# Altium PCB Main.PcbDoc (part 2 of 2)
Units mil, origin at the board's own origin, x right, y up, seen from the top; angles counter-clockwise.
Board outline 3937.01 x 3937.01 mil, 2 copper layers (Top Layer, Bottom Layer); 174 components, 113 nets, 601 pads, 322 vias.
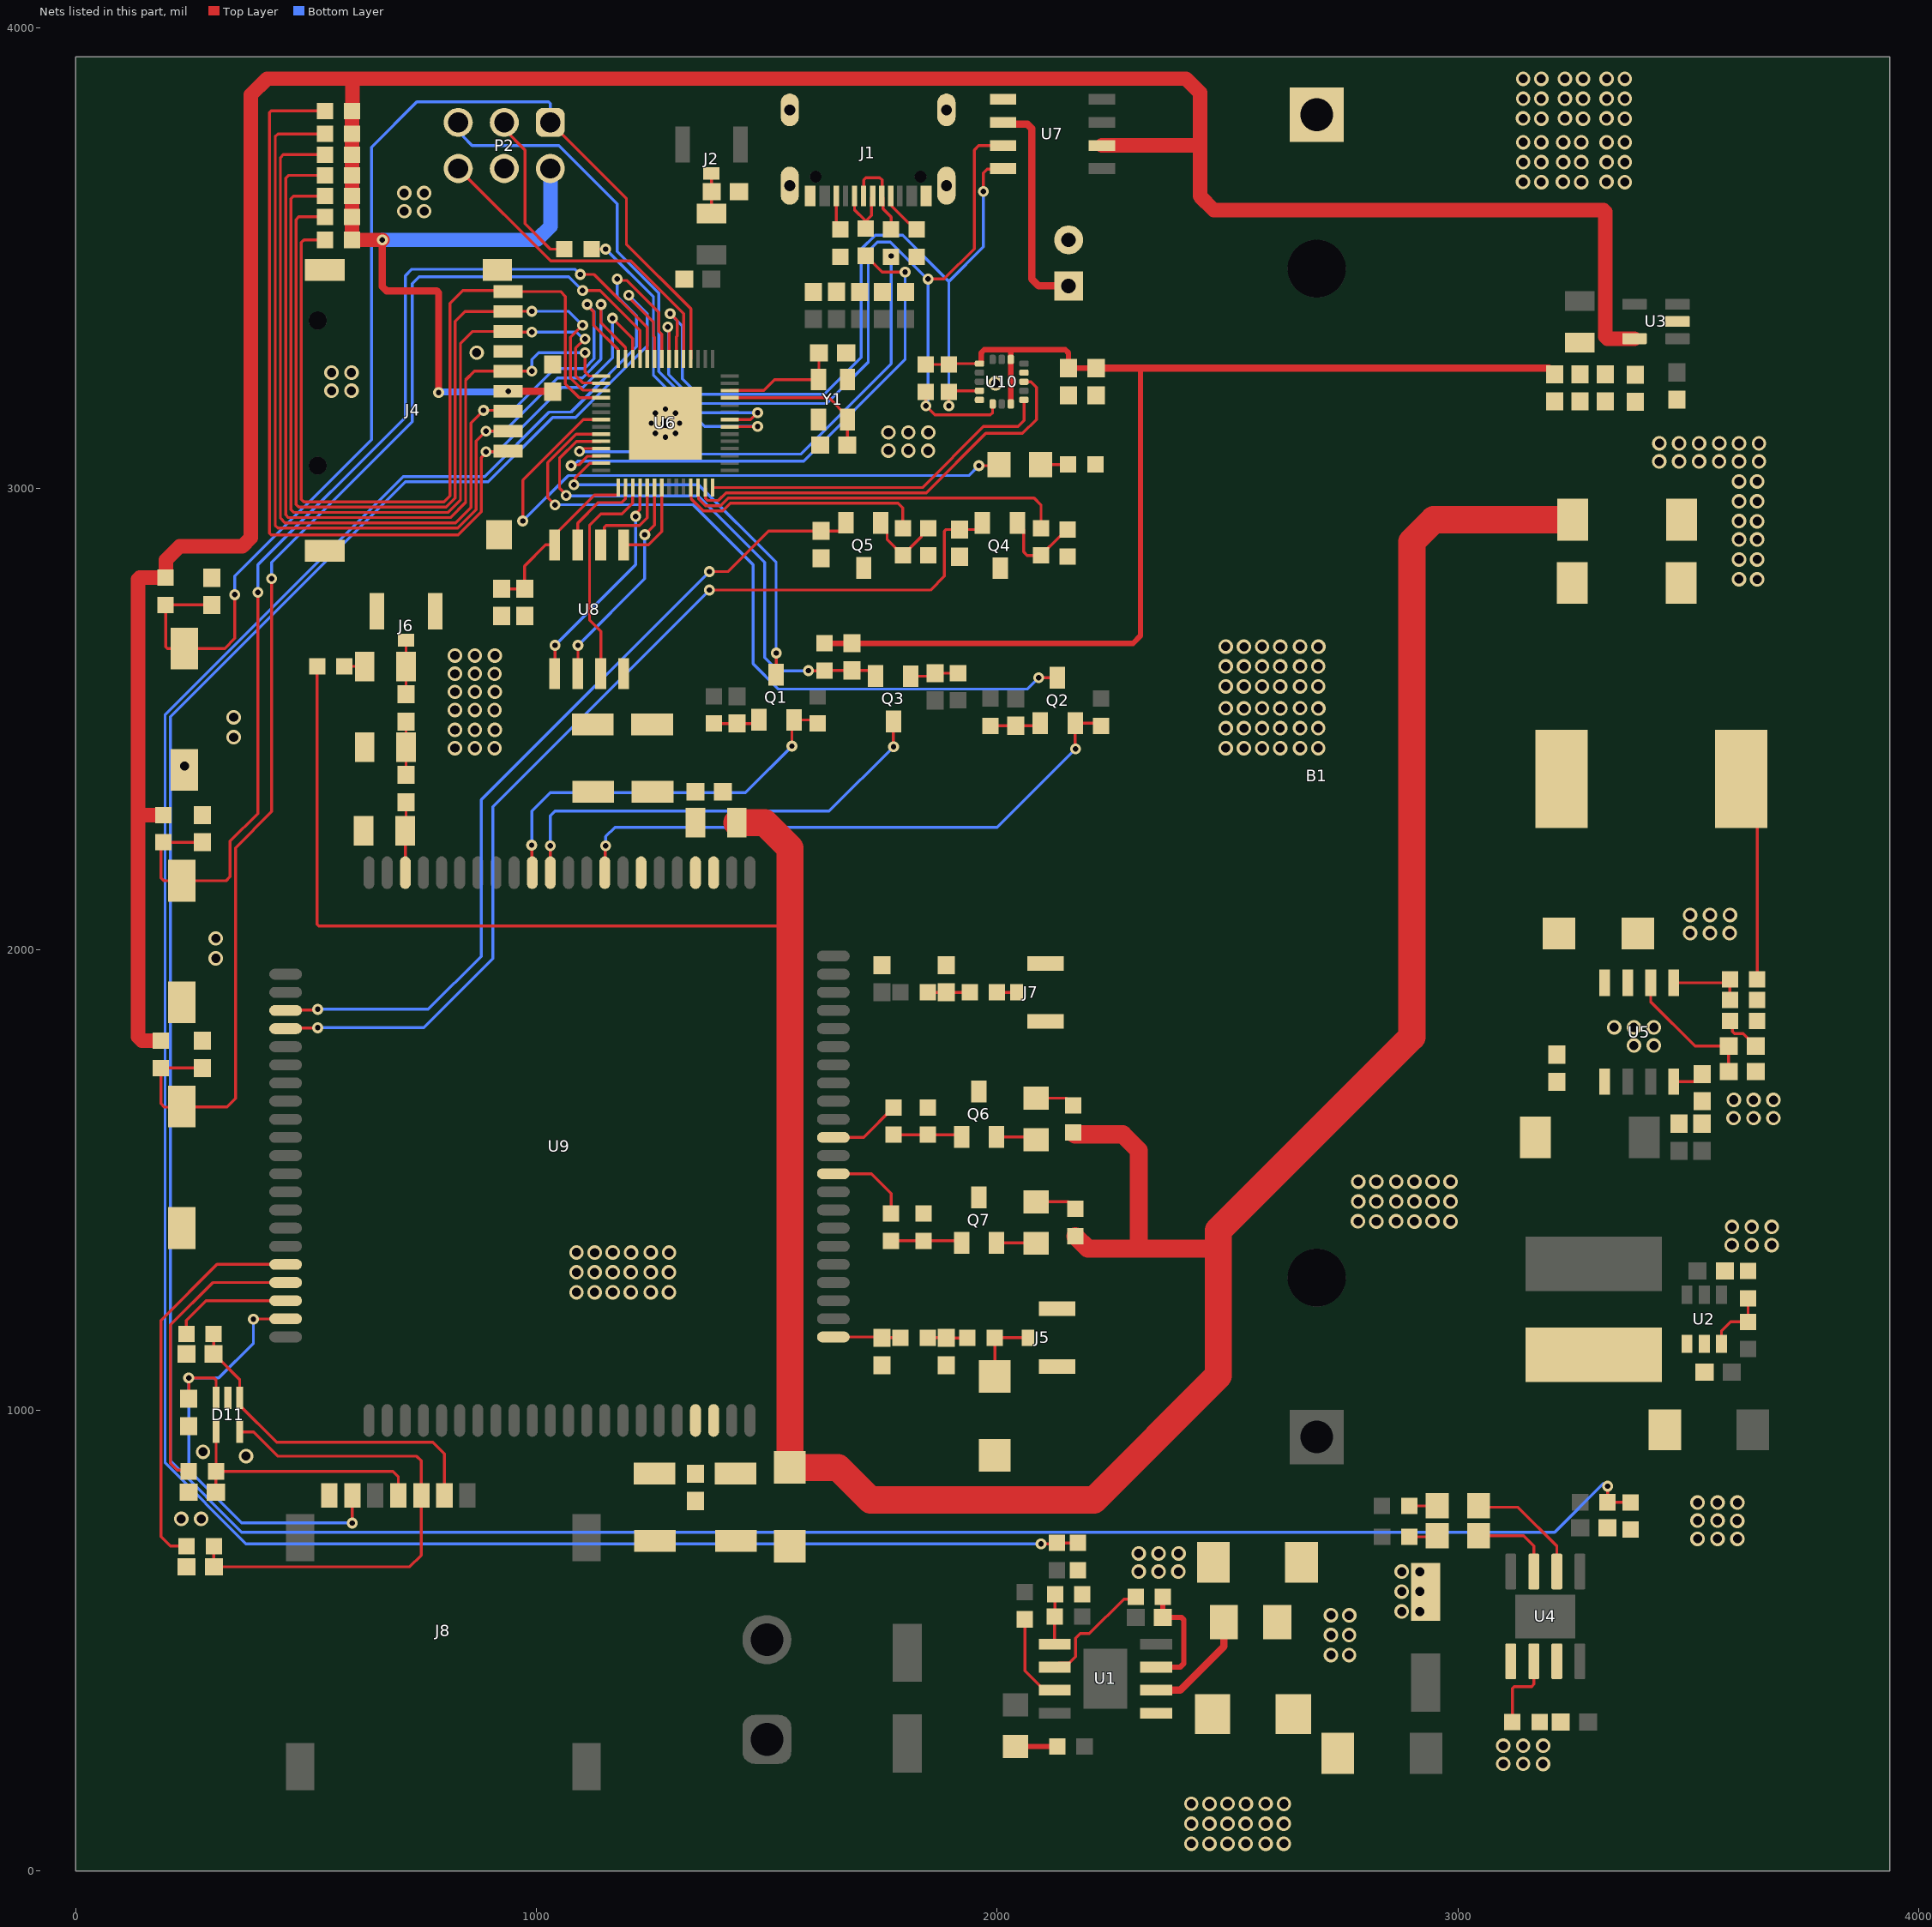
[diagram p2: the nets of this part, all layers, seen from the top]

## Via types
v1: diameter 31.5, hole 19.68, Top Layer to Bottom Layer, tented both sides, 252 vias
v2: diameter 23.62, hole 11.81, Top Layer to Bottom Layer, tented both sides, 70 vias

## Nets (pads, with @x,y where several pads share a name; then routed paths per layer and width w, separated by ;. In a path a pad name is that pad's centre, name@x,y a point inside that pad or via, vN(x,y) a via of type N, cw(c..) or ccw(c..) an arc to the next point about the centre after c; other vN are vias at no path point) (continued)
BATTERY-: B1.2 C4.1 C5.1 C6.2 C7.1 C8.1 C9.1 C10.1 C12.2 C13.2 C14.1 C16.1 C17.1 C18.2 C19.1 C20.1 C21.1 C22.1 C23.2 C24.1 C25.1 C26.1 C27.1 C28.1 C29.2 C30.1 C31.1 C32.2 C33.2 C34.1 C35.1 C36.1 C37.2 C38.1 C39.1 C42.1 C43.1 C44.2 C45.2 C46.2 C47.2 C48.1 C49.2 C50.2 C51.1 C52.2 C53.2 C58.2 C59.2 C60.1 C61.1 D3.1 D7.1 D9.1 D10.1 D11.2 J1.A1/B12 J1.A12/B1 J1.Shell J3.2 J4.6 J4.Shell J5.2 J6.2 J7.2 J8.5 L7.1 L8.1 P2.4 Q4.3 Q5.3 Q6.3 Q7.3 R5.1 R6.1 R9.2 R11.2 R14.2 R16.1 R17.1 R20.2 R21.2 R25.2 R52.2 R53.2 R58.1 R59.1 SW1.1 SW2.1 SW3.1 U2.2 U3.2 U4.3 U5.7 U6.57 U7.5 U8.4 U10.5 U10.12 Y1.2 Y1.4
  other v1: 2421.26,59.06 2460.63,59.06 2500,59.06 2539.37,59.06 2582.68,59.06 2622.05,59.06 2421.26,102.36 2460.63,102.36 2500,102.36 2539.37,102.36 2582.68,102.36 2622.05,102.36 2421.26,145.67 2460.86,145.18 2500,145.67 2539.6,145.18 2582.68,145.67 2622.27,145.18 3098.43,232.28 3141.73,232.28 3184.55,232.06 3098.43,271.65 3141.73,271.65 3185.04,271.65 2724.41,468.5 2763.78,468.5 2724.41,511.81 2763.78,511.81 2764.01,554.63 2724.41,555.12 2877.95,562.99 2917.32,562.99 2877.95,606.3 2917.32,606.3 2307.09,649.61 2350.39,649.61 2393.21,649.38 2877.95,649.61 2917.55,649.12 2307.09,688.98 2350.39,688.98 2393.7,688.98 3520.17,720.7 3563.48,720.7 3606.79,720.7 3520.17,760.07 3563.48,760.07 3606.3,759.84 228.83,764.01 272.14,764.01 3520.17,799.44 3563.48,799.44 3606.79,799.44 369.26,900.25 276.08,909.67 1086.61,1255.91 1125.98,1255.91 1165.35,1255.91 1204.72,1255.91 1248.03,1255.91 1287.4,1255.91 1086.61,1299.21 1125.98,1299.21 1165.35,1299.21 1204.72,1299.21 1248.03,1299.21 1287.4,1299.21 1086.61,1342.52 1126.21,1342.03 1165.35,1342.52 1204.95,1342.03 1248.03,1342.52 1287.63,1342.03 3594.49,1358.27 3637.8,1358.27 3681.1,1358.27 3637.8,1397.64 3681.1,1397.64 3594.97,1397.86 2822.83,1409.45 2905.51,1409.45 2984.25,1409.45 2783.24,1409.94 2865.92,1409.94 2944.66,1409.94 2783.46,1452.76 2822.83,1452.76 2866.14,1452.76 2905.51,1452.76 2944.88,1452.76 2984.25,1452.76 2783.46,1496.06 2822.83,1496.06 2866.14,1496.06 2905.51,1496.06 2944.88,1496.06 2984.25,1496.06 3598.43,1633.86 3641.73,1633.86 3685.04,1633.86 3598.91,1673.45 3641.73,1673.23 3685.04,1673.23 3381.89,1791.34 3425.2,1791.34 3339.07,1830.93 3381.89,1830.71 3425.2,1830.71 303.64,1980.54 303.64,2023.85 3503.94,2035.43 3547.24,2035.43 3590.06,2035.21 3503.94,2074.8 3547.24,2074.8 3590.55,2074.8 236.22,2397.64 822.83,2437.01 866.14,2437.01 908.96,2436.78 2496.06,2437.01 2535.43,2437.01 2574.8,2437.01 2614.17,2437.01 2657.48,2437.01 2696.85,2437.01 342.52,2460.63 822.83,2476.38 866.14,2476.38 909.45,2476.38 2496.06,2480.31 2535.43,2480.31 2574.8,2480.31 2614.17,2480.31 2657.48,2480.31 2696.85,2480.31 342.52,2503.94 822.83,2519.69 866.14,2519.69 908.96,2519.46 2496.06,2523.62 2535.66,2523.14 2574.8,2523.62 2614.4,2523.14 2657.48,2523.62 2697.08,2523.14 822.83,2559.06 866.14,2559.06 909.45,2559.06 2496.06,2570.87 2535.43,2570.87 2574.8,2570.87 2614.17,2570.87 2657.48,2570.87 2696.85,2570.87 822.83,2598.43 866.14,2598.43 908.96,2598.2 2496.06,2614.17 2535.43,2614.17 2574.8,2614.17 2614.17,2614.17 2657.48,2614.17 2696.85,2614.17 822.83,2637.8 866.14,2637.8 909.45,2637.8 2496.06,2657.48 2535.66,2656.99 2574.8,2657.48 2614.4,2656.99 2657.48,2657.48 2697.08,2656.99 3610.01,2803.64 3649.61,2803.15 3610.24,2846.46 3649.61,2846.46 3610.24,2889.76 3649.61,2889.76 3610.01,2929.62 3649.61,2929.13 3610.24,2972.44 3649.61,2972.44 3610.24,3015.75 3649.61,3015.75 3437.01,3059.06 3480.31,3059.06 3523.62,3059.06 3566.93,3059.06 3610.24,3059.06 3653.54,3059.06 1763.78,3082.68 1807.09,3082.68 1849.91,3082.45 3437.49,3098.65 3480.31,3098.43 3523.62,3098.43 3567.42,3098.65 3610.24,3098.43 3653.54,3098.43 1763.78,3122.05 1807.09,3122.05 1850.39,3122.05 1279.75,3142.19 555.12,3212.6 598.43,3212.6 1996.06,3228.35 555.12,3251.97 598.43,3251.97 870.08,3295.28 712.6,3602.36 755.91,3602.36 712.6,3641.73 755.91,3641.73 3181.1,3665.35 3267.72,3665.35 3362.2,3665.35 3141.51,3665.84 3228.12,3665.84 3322.61,3665.84 3141.73,3708.66 3181.1,3708.66 3228.35,3708.66 3267.72,3708.66 3322.83,3708.66 3362.2,3708.66 3141.73,3751.97 3181.1,3751.97 3228.35,3751.97 3267.72,3751.97 3322.83,3751.97 3362.2,3751.97 3141.51,3803.64 3181.1,3803.15 3232.06,3803.64 3271.65,3803.15 3322.61,3803.64 3362.2,3803.15 3141.73,3846.46 3181.1,3846.46 3232.28,3846.46 3271.65,3846.46 3322.83,3846.46 3362.2,3846.46 3141.73,3889.76 3181.1,3889.76 3232.28,3889.76 3271.65,3889.76 3322.83,3889.76 3362.2,3889.76
  other v2: 1279.75,3111.57 1258.1,3120.54 1301.4,3120.54 1249.13,3142.19 1310.37,3142.19 1258.1,3163.85 1301.4,3163.85 1279.75,3172.81
BOOT-IO0: P2.6 U6.5 | length 717.8
  Top Layer w6.3: P2.6@830,3695 1030.87,3494.13 1205.21,3494.13 1319.12,3380.22 U6.5@1319.12,3281.96
CHRG: D6.2 U4.7 | length 184.9
  Top Layer w6.3: D6.2@3044.75,727.19 3142.81,727.19 3165,705 3165,649.88 U4.7@3164.75,649.63
ESP-RESET: C32.1 P2.1 R33.1 SW1.2 U6.4 | length 2652.3
  Top Layer w6.3: C32.1@294.75,2747.66 R33.1@194.75,2747.66 194.75,2657.01 198.44,2653.32 SW1.2@235.73,2653.32 323.32,2653.32 345,2675 v2(345,2770) ; P2.1@1030,3795 1195,3630 1195,3530.56 1334.96,3390.6 1334.96,3328.12 1334.87,3328.03 U6.4@1334.87,3281.96
  Bottom Layer w6.3: v2(345,2770) 345,2810 641.46,3106.46 641.46,3741.46 740,3840 1026.31,3840 1030,3836.31 P2.1@1030,3795
FL-CLK: U6.33 U8.6 | length 208.9
  Top Layer w6.3: U8.6@1139.28,2877.94 1146.95,2885.61 1146.95,2916.31 1150.64,2920 1223.23,2920 1240.38,2937.15 U6.33@1240.38,3002.43
FL-CS: U6.32 U8.1 | length 480.8
  Top Layer w6.3: U8.1@1039.28,2598.41 1040,2599.13 v2(1040,2660) ; v2(1215,2940) 1215,2944.69 1224.63,2954.32 U6.32@1224.63,3002.43
  Bottom Layer w6.3: v2(1040,2660) 1215,2835 v2(1215,2940)
FL-DI: U6.35 U8.5 | length 190.1
  Top Layer w6.3: U8.5@1189.28,2877.94 1242.94,2877.94 1271.88,2906.88 U6.35@1271.88,3002.43
FL-DO: U6.34 U8.2 | length 473.1
  Top Layer w6.3: U8.2@1089.28,2598.41 1090,2599.13 v2(1090,2660) ; v2(1234.96,2900) 1256.13,2921.17 U6.34@1256.13,3002.43
  Bottom Layer w6.3: v2(1090,2660) 1234.74,2804.74 1234.74,2899.78 v2(1234.96,2900)
FL-HD: U6.30 U8.7 | length 197.4
  Top Layer w6.3: U8.7@1089.28,2877.94 1089.28,2925.26 1134.02,2970 1185,2970 1193.09,2978.09 1193.09,3002.38 U6.30@1193.14,3002.43
FL-VDD: C35.2 C36.2 U6.29 U8.8 | length 395
  Top Layer w6.3: C35.2@924.28,2782.7 C36.2@974.28,2782.7 974.28,2832.22 1020,2877.94 U8.8@1039.28,2877.94 1039.28,2899.59 1125.58,2985.89 1176.6,2985.89 1177.39,2986.68 U6.29@1177.39,3002.43
FL-WP: U6.31 U8.3 | length 571.2
  Top Layer w6.3: U6.31@1208.88,3002.43 1208.88,2968.88 1185,2945 1140,2945 1115,2920 1115,2715 1140,2690 ; 1140,2690 1140,2598.41 1140,2690
GNSS-ANT: C40.2 L7.2 U9.79 | length 154
  Top Layer w6.3: U9.79@715.1,2166.68 715.1,2256.72 L7.2@714.63,2257.19 716.73,2259.29 C40.2@716.73,2319.66
I2C0-SCL: R19.1 U6.6 U7.8 U10.4 | length 1852.6
  Top Layer w6.3: v2(1290,3380) 1305.04,3364.96 1305.04,3331.55 1303.37,3329.88 U6.6@1303.37,3281.96 ; v2(1895,3180) R19.1@1895,3210.47 1897.04,3212.51 U10.4@1961.52,3212.51 ; v2(1970,3645) 1970,3685 1978.41,3693.41 2011.13,3693.41 U7.8@2012.72,3695
  Bottom Layer w6.3: v2(1290,3380) 1316.87,3353.13 1316.87,3238.13 1350,3205 1625,3205 1705,3285 1705,3520 1735,3550 1795,3550 1895,3450 ; v2(1895,3180) 1895,3450 ; v2(1970,3645) 1970,3525 1895,3450
I2C0-SDA: R18.1 U6.7 U7.7 U10.6 | length 1969.2
  Top Layer w6.3: v2(1285.08,3351.21) 1288.02,3348.27 1288.02,3282.35 U6.7@1287.62,3281.96 ; R18.1@1845,3210.47 v2(1845,3180) 1865,3160 1985,3160 1990,3165 1990,3183.9 U10.6@1990.07,3183.96 ; v2(1850,3455) 1884.37,3455 1950,3520.63 1950,3735 1960,3745 U7.7@2012.72,3745
  Bottom Layer w6.3: v2(1285.08,3351.21) 1286.85,3349.44 1286.85,3248.15 1350,3185 1630,3185 1720,3275 1720,3515 1740,3535 1768.23,3535 1848.23,3455 v2(1850,3455) 1850,3192.35 1848.31,3190.67 1848.31,3183.31 v2@1847.5,3182.5
MAIN-ANT: C38.2 R36.1 U9.82 | length 147
  Top Layer w6.3: U9.82@1644.24,1158.81 1747.66,1158.81 C38.2@1749.75,1156.72 1750.22,1157.19 R36.1@1790.22,1157.19
NET-LIGHT: R54.2 U9.51 | length 157.4
  Top Layer w6.3: U9.51@1644.24,1591.88 1709.91,1591.88 R54.2@1774.75,1656.72
NetC1_1: C1.1 U1.2 | length 239.3
  Top Layer w15.75: U1.2@2344.99,392.19 2397.19,392.19 2491.93,486.93 C1.1@2491.93,540
NetC1_2: C1.2 D3.2 L2.1 U1.1
NetC3_2: C3.2 R1.2 U1.3 | length 250.8
  Top Layer w11.81: U1.3@2344.99,442.19 2397.19,442.19 2405,450 2405,545 2400,550 C3.2@2359.53,550 R1.2@2359.53,595
NetC11_1: C11.1 U5.1 | length 0.6
  Top Layer w6.3: C11.1@3214.75,1712.66 C11.1@3215.15,1713.07
NetC11_2: C11.2 D7.2 L3.1 U5.8
NetC14_2: C14.2 C15.2 U5.6 | length 305.4
  Top Layer w6.3: U5.6@3418.53,1927.63 3418.53,1886.47 3515,1790 3587.41,1790 C15.2@3587.66,1790.25 C14.2@3587.66,1735.25
NetC15_1: C15.1 R16.2 | length 89.5
  Top Layer w6.3: R16.2@3590.47,1845 3595.92,1839.55 3595.92,1821.52 3600.34,1817.1 3618.89,1817.1 3645.74,1790.25 C15.1@3646.72,1790.25
NetC19_2: C19.2 U5.4 | length 68.8
  Top Layer w6.3: U5.4@3468.53,1713.07 3514.45,1713.07 3530,1728.62 C19.2@3530,1729.53
NetC21_2: C21.2 J2.1 L4.2 | length 261.4
  Top Layer w6.3: L4.2@1379.75,3597.07 J2.1@1379.75,3684.2 ; L4.2@1379.75,3597.07 J2.1@1379.75,3684.2 ; L4.2@1379.75,3597.07 J2.1@1379.75,3684.2
NetC39_2: C39.2 R36.2 R37.1 | length 86.3
  Top Layer w6.3: R36.2@1849.28,1157.19 1889.28,1157.19 C39.2@1889.75,1156.72 1934.75,1156.72 R37.1@1935.22,1157.19
NetC40_1: C40.1 C41.2 L8.2 | length 116
  Top Layer w6.3: C40.1@716.73,2378.72 716.61,2378.84 L8.2@716.61,2439.19 716.73,2439.31 C41.2@716.73,2494.66
NetC41_1: C41.1 J6.1 L6.1 | length 117.6
  Top Layer w6.3: C41.1@716.73,2553.72 716.61,2553.84 L6.1@716.61,2614.19 716.73,2614.31 J6.1@716.73,2671.2
NetC43_2: C43.2 R39.2 R40.1 | length 90.9
  Top Layer w6.3: R39.2@1849.28,1906.84 C43.2@1889.75,1906.84 R40.1@1940.22,1906.84
NetC44_1: C44.1 D11.4 J8.2 R43.1 | length 572.1
  Top Layer w6.3: C44.1@304.05,822 R43.1@304.06,867 ; D11.4@304.41,952.99 304.41,867.35 R43.1@304.06,867 ; J8.2@700,815 700,855 688,867 R43.1@304.06,867
NetC45_1: C45.1 D11.1 J8.3 R42.1 | length 756.5
  Top Layer w6.3: R42.1@299.05,1165 C45.1@299.06,1122 300.04,1122 355.59,1066.45 D11.1@355.59,1027.01 355.59,1010.67 436.26,930 775,930 800,905 J8.3@800,815
NetC46_1: C46.1 D11.5 J8.7 R41.1 | length 1131.3
  Top Layer w6.3: R41.1@299.53,705 C46.1@299.53,660 725,660 750,685 J8.7@750,815 750,890 740,900 438.58,900 385.59,952.99 D11.5@355.59,952.99
NetC54_1: C54.1 Q3.2 R44.1 U6.24 | length 1147.9
  Top Layer w6.3: v2(1064.18,2985.23) 1064.18,2986.7 1049.87,3001 1049.87,3066.33 1086.36,3102.82 U6.24@1139.99,3102.82 ; v2(1590,2605) 1624.53,2605 R44.1@1625,2605.47 C54.1@1685,2605.47 1723.85,2605.47 Q3.2@1736.15,2593.18
  Bottom Layer w6.3: v2(1064.18,2985.23) 1065.01,2984.4 1350.6,2984.4 1495,2840 1495,2633.69 1523.69,2605 v2(1590,2605)
NetC55_2: C55.2 Q1.1 R47.2 | length 100.9
  Top Layer w6.3: R47.2@1385,2490.47 C55.2@1435,2490.47 1475.03,2490.47 Q1.1@1482.75,2498.19
NetC56_2: C56.2 Q2.1 R48.2 | length 111
  Top Layer w6.3: R48.2@1985,2485.47 C56.2@2040,2485.47 2087.67,2485.47 Q2.1@2093.55,2491.36
NetC57_2: C57.2 Q3.1 R49.2 | length 105.8
  Top Layer w6.3: Q3.1@1811.95,2592.96 1858.44,2592.96 C57.2@1865,2599.53 R49.2@1915,2599.53
NetD1_1: D1.1 L1.2 U2.1
NetD2_1: D2.1 L2.2
NetD4_2: D4.2 R7.1 | length 90.5
  Top Layer w11.81: D4.2@2040,270 R7.1@2130.47,270
NetD5_1: D5.1 R12.1 | length 60.5
  Top Layer w6.3: R12.1@2894.28,792.19 D5.1@2954.75,792.19
NetD6_1: D6.1 R13.1 | length 61.1
  Top Layer w6.3: R13.1@2894.53,725 2952.56,725 D6.1@2954.75,727.19
NetD8_2: D8.2 R25.1 | length 60
  Top Layer w6.3: D8.2@2093.9,3052.63 R25.1@2153.9,3052.63
NetD9_2: D9.2 J5.1 R37.2 | length 157
  Top Layer w6.3: D9.2@1994.75,1072.82 1994.75,1156.72 R37.2@1994.28,1157.19 J5.1@2066.76,1157.19
NetD12_1: D12.1 R50.1 | length 86.4
  Top Layer w6.3: D12.1@2084.75,1677.19 2149.28,1677.19 R50.1@2164.75,1661.72
NetD12_2: D12.2 Q6.2 | length 88.6
  Top Layer w6.3: Q6.2@1998.55,1592.98 2078.96,1592.98 D12.2@2084.75,1587.19
NetD13_1: D13.1 R51.1 | length 91.4
  Top Layer w6.3: D13.1@2084.75,1452.19 2154.28,1452.19 R51.1@2169.75,1436.72
NetD13_2: D13.2 Q7.2 | length 86.5
  Top Layer w6.3: Q7.2@1998.55,1362.98 2083.96,1362.98 D13.2@2084.75,1362.19
NetJ1_A5: J1.A5 R20.1 | length 97.7
  Top Layer w6.3: J1.A5@1768.96,3635.26 1771.72,3632.51 1771.72,3612.32 1806.84,3577.2 1810.18,3577.2 R20.1@1824.75,3562.63
NetJ1_B5: J1.B5 R21.1 | length 76.3
  Top Layer w6.3: J1.B5@1650.85,3635.26 1650.85,3571.53 R21.1@1659.75,3562.63
NetJ3_1: J3.1 U7.6 | length 480.8
  Top Layer w15.75: U7.6@2012.72,3795 2016.65,3791.06 2065.78,3791.06 2075,3781.84 2075,3455 2090,3440 J3.1@2155,3440
NetJ7_1: J7.1 R40.2 | length 42.5
  Top Layer w6.3: R40.2@1999.28,1906.84 J7.1@2041.76,1906.84
NetL6_2: L6.2 R38.2 | length 43.9
  Top Layer w6.3: R38.2@582.97,2614.36 626.67,2614.36 L6.2@626.85,2614.19
NetQ1_3: Q1.3 U6.27 | length 838.5
  Top Layer w6.3: v2(1080.79,3008.53) 1083.65,3011.39 1083.65,3023.15 1115.84,3055.34 1139.74,3055.34 U6.27@1139.99,3055.58 ; Q1.3@1519.95,2596.41 1520.36,2596.81 v2(1520.36,2643.32)
  Bottom Layer w6.3: v2(1080.79,3008.53) 1351.47,3008.53 1520,2840 1520,2643.68 v2(1520.36,2643.32)
NetQ2_3: Q2.3 U6.23 | length 1632.8
  Top Layer w6.3: v2(1040,2965) 1024.11,2980.89 1024.11,3056.55 1086.13,3118.57 U6.23@1139.99,3118.57 ; v2(2090,2590) 2130.32,2590 Q2.3@2130.75,2589.57
  Bottom Layer w6.3: v2@1040,2965 1040.28,2965.27 1339.73,2965.27 1470,2835 1470,2620 1525,2565 2065,2565 v2(2090,2590)
NetQ4_1: Q4.1 R52.1 R56.2 | length 190.9
  Top Layer w6.3: Q4.1@2043.53,2925.72 2057.11,2912.13 2057.11,2862.89 2065,2855 2094.53,2855 R56.2@2095,2855.47 2136.3,2896.78 2138.38,2896.78 R52.1@2152.94,2911.34
NetQ5_1: Q5.1 R53.1 R57.2 | length 172
  Top Layer w6.3: Q5.1@1747.43,2925.92 1761.02,2912.34 1761.02,2889.46 R57.2@1795,2855.47 1835.43,2895.91 1835.43,2899.96 R53.1@1850,2914.53
NetQ6_1: Q6.1 R54.1 R58.2 | length 149.9
  Top Layer w6.3: R54.1@1774.75,1597.66 R58.2@1849.75,1597.66 1918.28,1597.66 Q6.1@1922.75,1593.19
NetQ7_1: Q7.1 R55.1 R59.2 | length 154.9
  Top Layer w6.3: R55.1@1769.75,1367.66 R59.2@1839.75,1367.66 1918.28,1367.66 Q7.1@1922.75,1363.19
NetR1_1: R1.1 U1.6 | length 262.7
  Top Layer w6.3: U1.6@2124.51,442.19 2133.18,450.85 2155.85,450.85 2170,465 2170,505 2180,515 2200,515 2275,590 2295.47,590 R1.1@2300.47,595
NetR2_1: R2.1 R5.2 U1.5 | length 108.2
  Top Layer w6.3: U1.5@2124.51,492.19 2124.51,551.48 R2.1@2125.22,552.19 2125.47,552.44 R5.2@2125.47,600
NetR3_1: R3.1 R6.2 U2.3 | length 144.8
  Top Layer w6.3: U2.3@3572.15,1144.04 3572.15,1172.15 3591.72,1191.72 R3.1@3629.75,1191.72 R6.2@3629.75,1242.66
NetR4_1: R4.1 U1.7 | length 193.7
  Top Layer w6.3: R4.1@2060,545.94 2060,434.07 2101.88,392.19 U1.7@2124.51,392.19
NetR8_2: R8.2 R9.1 U6.8 | length 5420.6
  Top Layer w6.3: v2(1175,3455) 1178.03,3451.97 1196.26,3451.97 1265.12,3383.11 1265.12,3341.65 1271.88,3334.9 U6.8@1271.88,3281.96 ; v2(2095,710) 2128.03,710 R8.2@2129.75,711.72 R9.1@2174.75,711.72
  Bottom Layer w6.3: v2(1175,3455) 1175,3416.77 1216.77,3375 1216.77,3308.07 1075,3166.3 1027.5,3166.3 887.5,3026.3 710.32,3026.3 193.7,2509.68 193.7,885.32 369.02,710 v2(2095,710)
NetR10_2: R10.2 R11.1 U6.9 | length 6587.8
  Top Layer w6.3: v2(1200,3420) 1200,3415.47 1253.82,3361.65 1253.82,3331.22 1256.13,3328.92 U6.9@1256.13,3281.96 ; v2(3325,835) 3325,800.47 R10.2@3324.53,800 3374.53,800 R11.1@3375,799.53
  Bottom Layer w6.3: v2(1200,3420) 1240,3380 1240,3310 1085,3155 1035,3155 895,3015 715,3015 205,2505 205,890 359.96,735.04 3210.04,735.04 3316.09,841.09 3322.18,835 v2(3325,835)
NetR14_1: R14.1 U4.2 | length 173.8
  Top Layer w6.3: R14.1@3118.11,322.83 3118.11,374.53 3118.11,396.31 3121.8,400 3160,400 3165,405 3165,454.5 U4.2@3164.75,454.75
NetR15_1: R15.1 R17.2 U5.5 | length 170
  Top Layer w6.3: U5.5@3468.53,1927.63 3583.11,1927.63 R15.1@3590.47,1935 R17.2@3590.47,1890
NetR22_1: R22.1 U6.49 | length 680.3
  Top Layer w6.3: R22.1@1119.53,3520 v2(1150,3520) ; U6.49@1419.51,3134.32 1419.85,3134.66 1479.66,3134.66 v2(1480,3135)
  Bottom Layer w6.3: v2(1150,3520) 1253.82,3416.18 1253.82,3246.18 1365,3135 v2(1480,3135)
NetR23_1: R23.1 U6.26 | length 1184.1
  Top Layer w6.3: v2(1075,3050) 1076.77,3051.77 1091.77,3051.77 1110.54,3070.54 1139.2,3070.54 U6.26@1139.99,3071.33 ; R23.1@1714.75,3505.58 1750.33,3470 v2(1800,3470)
  Bottom Layer w6.3: v2(1075,3050) 1079.69,3050 1089.64,3059.96 1096.7,3059.96 1096.74,3060 1580,3060 1800,3280 v2(1800,3470)
NetR24_1: R24.1 U6.25 | length 1043.7
  Top Layer w6.3: v2(1093.15,3081.38) 1097.84,3081.38 1103.66,3087.2 1139.86,3087.2 U6.25@1139.99,3087.07
  Bottom Layer w6.3: v2(1093.15,3081.38) 1094.62,3079.92 1334.04,3079.92 1338.9,3075.06 1573.63,3075.06 1770,3271.43 v2(1770,3505)
NetR56_1: R56.1 U6.40 | length 837.6
  Top Layer w6.3: U6.40@1350.62,3002.43 1351.4,3001.64 1351.4,2978.46 1366.57,2963.29 1399.27,2963.29 1415.81,2979.83 2080.17,2979.83 2095,2965 R56.1@2095,2914.53
NetR57_1: R57.1 U6.39 | length 549.7
  Top Layer w6.3: U6.39@1334.87,3002.43 1335.66,3001.64 1335.66,2978.23 1361.89,2951.99 1403.95,2951.99 1420.49,2968.53 1785,2968.53 1795,2958.53 R57.1@1795,2914.53
NetU6_41: U6.41 U10.11 | length 918.3
  Top Layer w6.3: U6.41@1366.36,3002.43 1367.15,3001.64 1367.15,2978.69 1371.25,2974.59 1394.59,2974.59 1411.13,2991.13 1846.13,2991.13 1975,3120 2055,3120 2085,3150 2085,3220 2073.27,3231.73 2058.44,3231.73 U10.11@2057.98,3232.19
NetU6_42: U6.42 U10.9 | length 781
  Top Layer w6.3: U6.42@1382.11,3002.43 1837.43,3002.43 1970,3135 2045,3135 2057.98,3147.98 U10.9@2057.98,3192.82
OSCIN: C22.2 U6.54 Y1.1 | length 260.3
  Top Layer w6.3: U6.54@1419.51,3213.06 1493.06,3213.06 1516.87,3236.87 Y1.1@1612.01,3236.87 1612.98,3237.84 C22.2@1612.98,3294.44
OSCOUT: C23.1 U6.53 Y1.3 | length 334.3
  Top Layer w6.3: U6.53@1419.51,3197.31 1634.61,3197.31 1675,3156.92 Y1.3@1675,3150 1674.53,3149.53 C23.1@1674.53,3095
PWR-KEY: C59.1 Q5.2 U9.3 | length 1856.6
  Top Layer w6.3: U9.3@455.26,1867.47 456.53,1868.73 523.73,1868.73 v2(525,1870) ; v2(1375,2820) 1415,2820 1503.26,2908.26 C59.1@1617.68,2908.26 1658.05,2908.26 1671.64,2921.84 Q5.2@1671.64,2926.14
  Bottom Layer w6.3: v2(525,1870) 765,1870 880,1985 880,2325 v2(1375,2820)
RESET: C58.1 Q4.2 U9.4 | length 2218.3
  Top Layer w6.3: U9.4@455.26,1828.1 456.21,1829.05 524.05,1829.05 v2(525,1830) ; v2(1375,2780) 1855,2780 1885,2810 1885,2907.65 1888.69,2911.34 C58.1@1917.94,2911.34 1954.15,2911.34 1967.73,2924.93 Q4.2@1967.73,2925.93
  Bottom Layer w6.3: v2(525,1830) 755,1830 905,1980 905,2310 v2(1375,2780)
SD-CD: J4.9 R32.1 U6.18 | length 1906.5
  Top Layer w6.3: R32.1@540.47,3540 495.19,3540 489.29,3534.11 489.29,2977.07 495.19,2971.18 799.34,2971.18 812.2,2984.04 812.2,3402.2 840,3430 936.34,3430 J4.9@938.39,3427.95 1052.05,3427.95 1062.44,3417.56 1062.44,3227.56 1092.69,3197.31 U6.18@1139.99,3197.31
SD-CLK: J4.5 R29.1 U6.15 | length 1869.8
  Top Layer w6.3: R29.1@540.47,3680 461.29,3680 455.39,3674.11 455.39,2943.17 461.29,2937.28 813.38,2937.28 846.1,2970 846.1,3236.1 865,3255 938.11,3255 J4.5@938.39,3254.72 938.66,3255 v2(990,3255) ; v2(1105,3295) 1105,3253.24 1113.69,3244.55 U6.15@1139.99,3244.55
  Bottom Layer w6.3: v2(990,3255) 990,3280 1005,3295 v2(1105,3295)
SD-CMD: J4.3 R28.1 U6.14 | length 2146.2
  Top Layer w6.3: R28.1@540.47,3725 449.99,3725 444.09,3719.11 444.09,2935.89 454.01,2925.98 818.06,2925.98 824.02,2925.98 857.4,2959.36 857.4,3142.4 v2(885,3170) 936.5,3170 J4.3@938.39,3168.11 ; v2(1110,3400) 1110,3398.25 1124.16,3384.09 1124.16,3354.68 1176.6,3302.24 1176.6,3282.74 U6.14@1177.39,3281.96
  Bottom Layer w6.3: v2(885,3170) 948.04,3170 1038.93,3260.89 1104.11,3260.89 1125,3281.77 1125,3385 v2(1110,3400)
SD-DAT0: J4.7 R30.1 U6.16 | length 1910.2
  Top Layer w6.3: R30.1@540.47,3635 472.59,3635 466.69,3629.11 466.69,2954.47 472.59,2948.58 808.7,2948.58 834.8,2974.68 834.8,3314.8 861.34,3341.34 J4.7@938.39,3341.34 939.72,3340 v2(990,3340) ; v2(1105,3325) 1085.04,3305.04 1085.04,3244.96 1100.41,3229.59 1139.2,3229.59 U6.16@1139.99,3228.81
  Bottom Layer w6.3: v2(990,3340) 1086.77,3340 1101.77,3325 v2(1105,3325)
SD-DAT1: J4.8 R31.1 U6.17 | length 1924.3
  Top Layer w6.3: R31.1@540.47,3590 483.89,3590 477.99,3584.11 477.99,2965.89 484.01,2959.88 804.02,2959.88 810.64,2966.5 823.5,2979.36 823.5,3363.5 844.65,3384.65 J4.8@938.39,3384.65 938.74,3385 v2(990,3385) ; v2(1100,3355) 1073.74,3328.74 1073.74,3240.28 1083.7,3230.32 1100.18,3213.85 1123.45,3213.85 1124.24,3213.06 U6.17@1139.99,3213.06
  Bottom Layer w6.3: v2(990,3385) 1070,3385 v2(1100,3355)
SD-DAT2: J4.1 R26.1 U6.12 | length 2251.7
  Top Layer w6.3: R26.1@540.47,3820 423.69,3820 420,3816.31 420,2903.69 423.69,2900 830,2900 880,2950 880,3067.65 890,3077.65 v2(890,3080) 936.89,3080 J4.1@938.39,3081.5 ; v2(1165,3370) 1208.88,3326.12 U6.12@1208.88,3281.96
  Bottom Layer w6.3: v2(890,3080) 915,3080 1055,3220 1100.96,3220 1165,3284.04 v2(1165,3370)
SD-DAT3: J4.2 R27.1 U6.13 | length 2210
  Top Layer w6.3: R27.1@540.47,3770 438.69,3770 432.8,3764.11 432.8,2920.57 438.69,2914.68 828.7,2914.68 868.7,2954.68 868.7,3103.7 v2(890,3125) 938.19,3125 J4.2@938.39,3124.8 ; v2(1140,3400) 1140,3360 1193.14,3306.86 U6.13@1193.14,3281.96
  Bottom Layer w6.3: v2(890,3125) 930,3125 1045.52,3240.52 1099.72,3240.52 1140,3280.79 v2(1140,3400)
SIM-DTR: Q1.2 R45.2 U9.72 | length 869.9
  Top Layer w6.3: v2(989.48,2226.44) 990.09,2225.84 990.09,2167.29 U9.72@990.69,2166.68 ; v2(1554.34,2441.22) 1554.34,2493.77 Q1.2@1558.55,2497.98 1602.49,2497.98 R45.2@1610,2490.47
  Bottom Layer w6.3: v2(989.48,2226.44) 990,2226.96 990,2300 1030,2340 1453.12,2340 v2(1554.34,2441.22)
SIM-RTS: U9.66
SIM-RX: Q2.2 R46.2 U9.68 | length 1292.2
  Top Layer w6.3: U9.68@1148.18,2166.68 1149.09,2167.59 1149.09,2224.09 v2(1150,2225) ; v2(2170,2435) 2169.35,2435.65 Q2.2@2169.35,2491.14 2219.33,2491.14 R46.2@2225,2485.47
  Bottom Layer w6.3: v2(1150,2225) 1150,2245 1170,2265 2000,2265 v2(2170,2435)
SIM-TX: Q3.3 U9.71 | length 985.3
  Top Layer w6.3: U9.71@1030.07,2166.68 v2@1030.03,2224.97 ; Q3.3@1774.75,2494.75 1774.75,2440.25 v2(1775,2440)
  Bottom Layer w6.3: v2(1030,2225) 1030,2290 1040,2300 1635,2300 v2(1775,2440)
STATUS: R55.2 U9.49 | length 187
  Top Layer w6.3: U9.49@1644.24,1513.14 1726.86,1513.14 1770,1470 1770,1426.97 R55.2@1769.75,1426.72
STDBY: D5.2 U4.6 | length 261.6
  Top Layer w6.3: D5.2@3044.75,792.19 3047.75,789.19 3130.81,789.19 3214.75,705.25 U4.6@3214.75,649.63
TEMP: U4.1
U0RX: P2.5 U6.50 | length 1150
  Top Layer w6.3: U6.50@1419.55,3150.03 1464.9,3150.03 1479.87,3165 v2(1480,3165)
  Bottom Layer w6.3: P2.5@830,3795 840.85,3784.15 840.85,3764.15 860,3745 1048.23,3745 1175,3618.23 1175,3515 1265.12,3424.88 1265.12,3253.9 1354.02,3165 v2(1480,3165)
U0TX: P2.3 R22.2 | length 346.9
  Top Layer w6.3: P2.3@930,3795 930,3780 975,3735 975,3575 1030,3520 R22.2@1060.47,3520
USB-D+: J1.A6 J1.B6 R23.2 | length 141.2
  Top Layer w6.3: J1.B6@1690.22,3635.26 1690.22,3605.22 R23.2@1714.57,3580.87 ; R23.2@1714.57,3564.81 R23.2@1714.57,3580.87 ; J1.A6@1729.59,3635.26 1726.84,3632.51 1726.84,3593.13 R23.2@1714.57,3580.87
USB-D-: J1.A7 J1.B7 R24.2 | length 195.1
  Top Layer w6.3: J1.A7@1709.91,3635.26 1709.91,3669.91 1715,3675 1745,3675 1750,3670 1750,3635.98 J1.B7@1749.28,3635.26 1752.03,3632.51 1752.03,3607.52 1769.75,3589.8 R24.2@1769.75,3562.63
USER-BUTTON-1: C33.1 R34.1 SW2.2 U6.10 | length 2434.1
  Top Layer w6.3: C33.1@274.75,2232.66 R34.1@189.75,2232.66 185,2227.91 185,2155 190.92,2149.08 SW2.2@229.75,2149.08 326.25,2149.08 335,2157.83 335,2235 395,2295 v2(395,2775) ; v2(1095,3465) 1125.29,3465 1240.38,3349.91 U6.10@1240.38,3281.96
  Bottom Layer w6.3: v2(395,2775) 395,2835 715,3155 715,3462.29 729.02,3476.31 1082.65,3476.31 1093.96,3465 v2(1095,3465)
USER-BUTTON-2: C37.1 R35.1 SW3.2 U6.11 | length 2879.2
  Top Layer w6.3: SW3.2@229.01,1658.35 328.35,1658.35 346.46,1676.46 346.46,2220.47 425,2299.02 v2(425,2805) ; SW3.2@229.75,1659.08 228.28,1657.61 192.39,1657.61 184.75,1665.25 R35.1@184.75,1742.66 C37.1@274.75,1742.66 ; v2(1100,3430) 1138.23,3430 1224.63,3343.6 U6.11@1224.63,3281.96
  Bottom Layer w6.3: v2(425,2805) 425,2840 730,3145 730,3445 745,3460 1070,3460 v2(1100,3430)
USER-LED: D8.1 U6.21 | length 1397.6
  Top Layer w6.3: v2(970,2930) 970,3018.42 1101.65,3150.07 U6.21@1139.99,3150.07 ; v2(1960,3050) 2001.27,3050 D8.1@2003.9,3052.63
  Bottom Layer w6.3: v2(970,2930) 1068.5,3028.5 1938.43,3028.5 v2(1960,3050) v2(1960,3050)
USIM-CLK: R42.2 U9.19 | length 262.9
  Top Layer w6.3: R42.2@240,1165 240,1195 282.55,1237.55 U9.19@455.26,1237.55
USIM-DATA: R41.2 U9.17 | length 854
  Top Layer w6.3: R41.2@240.47,705 205.47,705 185,725.47 185,1195 306.29,1316.29 U9.17@455.26,1316.29
USIM-RST: R43.2 U9.18 | length 635.8
  Top Layer w6.3: R43.2@245,867 242,870 220,870 205,885 205,1185 296.92,1276.92 U9.18@455.26,1276.92
USIM-VDD: C47.1 D11.3 J8.1 U9.20 | length 1101.6
  Top Layer w6.3: C47.1@245,1024.53 v2(245,1070) 300,1070 304.41,1065.59 D11.3@304.41,1027.01 ; v2(385.46,1197.23) 386.18,1197.95 455.04,1197.95 U9.20@455.26,1198.18 ; v2(600,755) J8.1@600,815
  Bottom Layer w6.3: v2(385.46,1197.23) 385.46,1145.46 310,1070 v2(245,1070) 245,870 360,755 v2(600,755)
V-MCU: C9.2 C27.2 C28.2 C29.1 C34.2 C54.2 C60.2 C61.2 J4.4 L5.2 P2.2 R18.2 R19.2 R26.2 R27.2 R28.2 R29.2 R30.2 R31.2 R32.2 R33.2 R34.2 R35.2 R44.2 U3.5 U7.2 U10.1 U10.8 U10.14 | length 10564.6
  Top Layer w6.3: C34.2@1034.06,3211.42 C34.2@1035,3210.47 ; R18.2@1845,3269.53 R19.2@1895,3269.53 1897.03,3271.56 U10.1@1961.52,3271.56 ; 2434.35,3745 2440,3750.66
  Top Layer w11.81: R44.2@1625,2664.53 C54.2@1685,2664.53 2294.45,2664.53 2311.02,2681.1 2311.02,3261.72 ; U10.1@1964.02,3271.56 1965,3272.55 1965,3294.64 1971.92,3301.56 2029.61,3301.56 ; U10.8@2029.61,3183.96 2029.61,3301.56 ; C61.2@2214.75,3261.72 C60.2@2154.75,3261.72 2154.75,3294.64 2147.83,3301.56 2029.61,3301.56 ; C27.2@3197.1,3261.72 3209.9,3248.92 C27.2@3209.9,3248.52
  Top Layer w15.75: v2(665.35,3540) 665.35,3438.36 674.58,3429.13 783.46,3429.13 787.4,3425.2 v2(787.4,3208.66) ; v2(938.39,3211.42) C34.2@1034.06,3211.42 ; C61.2@2214.75,3261.72 2311.02,3261.72 C27.2@3197.1,3261.72
  Top Layer w31.5: R35.2@184.75,1801.72 143.28,1801.72 135,1810 135,2300 ; R34.2@189.75,2291.72 143.28,2291.72 135,2300 ; v2(665.35,3540) R32.2@599.53,3540 R31.2@599.53,3590 R30.2@599.53,3635 R29.2@599.53,3680 R28.2@599.53,3725 R27.2@599.53,3770 R26.2@599.53,3820 600,3820.47 600,3885 605,3890 ; U7.2@2227.28,3745 2434.35,3745 ; U3.5@3383.3,3325.56 3324.44,3325.56 3320,3330 3320,3601.31 3316.31,3605 2470,3605 2440,3635 2440,3750.66 2440,3860 2410,3890 605,3890 ; 135,2300 135,2803.03 138.69,2806.72 R33.2@194.75,2806.72 195.36,2807.33 195.36,2845.36 225,2875 361.55,2875 380,2893.45 380,3855 415,3890 605,3890
  Bottom Layer w6.3: v2(787.4,3208.66) v2@788.78,3210.04 ; v2@937.01,3210.04 v2(938.39,3211.42)
  Bottom Layer w15.75: v2@788.78,3210.04 v2@937.01,3210.04
  Bottom Layer w31.5: v2(665.35,3540) 1000.63,3540 1030,3569.37 P2.2@1030,3695
V-SIM: C12.1 C13.1 C51.2 C52.1 C53.1 D10.2 L3.2 L9.2 R15.2 R38.1 R50.2 R51.2 U9.38 U9.39 | length 7630
  Top Layer w6.3: R38.1@523.92,2614.36 523.92,2054.87 527.61,2051.18 1550,2051.18 ; L3.2@3615,2370 3649.53,2335.47 R15.2@3649.53,1935
  Top Layer w39.37: R50.2@2168.99,1598.43 2272.49,1598.43 2307.09,1563.83 2307.09,1350.39 ; R51.2@2169.75,1377.66 2197.02,1350.39 2307.09,1350.39 ; 2480,1350.39 2307.09,1350.39
  Top Layer w59.06: L9.2@1434.88,2275 1495,2275 1550,2220 1550,2051.18 D10.2@1550,875.63 1654.37,875.63 1725,805 2210,805 2480,1075 2480,1350.39 2480,1390 2900,1810 2900,2885 2947.82,2932.82 C12.1@3249.03,2932.82
V-SIM-62-63: C48.2 C49.1 C50.1 L9.1 U9.62 U9.63
pads on no net: B1. J1.A4/B9 J1.A8 J1.A9/B4 J1.B8 J1.MH1 J1.MH2 J2.2 J4.MH1 J4.MH2 J8.4 J8.6 J8.8 U2.6 U3.4 U4.9 U5.3 U6.19 U6.22 U6.28 U6.36 U6.37 U6.38 U6.43 U6.44 U6.45 U6.47 U6.48 U6.51 U6.52 U7.1 U7.3 U7.4 U9.1 U9.2 U9.5 U9.6 U9.7 U9.8 U9.9 U9.10 U9.11 U9.12 U9.13 U9.14 U9.16 U9.21 U9.22 U9.23 U9.24 U9.25 U9.26 U9.27 U9.28 U9.29 U9.30 U9.31 U9.32 U9.33 U9.34 U9.35 U9.36 U9.37 U9.40 U9.41 U9.42 U9.43 U9.44 U9.45 U9.46 U9.47 U9.48 U9.50 U9.52 U9.53 U9.54 U9.55 U9.56 U9.57 U9.58 U9.60 U9.61 U9.64 U9.65 U9.67 U9.69 U9.70 U9.73 U9.74 U9.75 U9.76 U9.77 U9.78 U9.80 U9.81 U9.83 U9.84 U9.85 U9.86 U9.87 U10.2 U10.3 U10.7 U10.10 U10.13 U10.15 U10.16

## Polygon pours and split planes (outlines as drawn)
BATTERY- on Top Layer "BATTERY-_L01_P040" (solid, remove dead copper, pour order 40): 0,0 3937.01,0 3937.01,3937.01 0,3937.01
+3.3V-MCU on Top Layer "+3.3V-MCU_L01_P038" (solid, pour order 38): 1400,3250 1375,3250 1370,3255 1370,3305 1367.04,3307.96 1347.04,3307.96 1345,3305.92 1345,3225 1400,3225
+3.3V-MCU on Top Layer "+3.3V-MCU_L01_P037" (solid, pour order 37): 1583.11,3389.51 1574.51,3389.51 1435,3250 1400,3250 1400,3225 1440,3225 1562.59,3347.59 1582.95,3347.59
V-SIM-62-63 on Top Layer "V-SIM-62-63_L01_P036" (solid, pour order 36): 1075,2380 1065,2370 1065,2320 1075,2310 1305,2310 1315,2300 1315,2240 1330,2225 1330,2125 1340,2115 1395,2115 1405,2125 1405,2215 1370,2250 1370,2375 1365,2380
V-SIM on Top Layer "V-SIM_L01_P034" (solid, pour order 34): 1592.5,837.5 1600,845 1600,910 1592.5,917.5 1417.5,917.5 1402.5,932.5 1402.5,1017.5 1397.5,1022.5 1337.5,1022.5 1332.5,1017.5 1332.5,932.5 1317.5,917.5 1207.5,917.5 1202.5,912.5 1202.5,842.5 1207.5,837.5
+5V on Top Layer "+5V_L01_P025" (solid, pour order 25): 3005,375 3020,390 3065,390 3085,410 3085,595 3095,605 3130,605 3140,615 3140,695 3130,705 3095,705 3075,685 3025,685 3010,670 3010,515 3000,505 3000,375
+5V on Top Layer "+5V_L01_P016" (solid, pour order 16): 3010,25 2845,25 2810,60 2810,495 2820,505 3000,505 3010,495
V-MCU on Top Layer "V-MCU_L01_P033" (solid, pour order 33): 3190,3345 3180,3335 3180,3235 3188.01,3226.99 3411.99,3226.99 3420,3235 3420,3340 3415,3345
V-SIM on Top Layer "V-SIM_L01_P032" (solid, pour order 32): 3670,2255 3685,2270 3685,2705 3660,2730 3390,2730 3340,2780 3340,3100 3320,3120 3195,3120 3170,3095 3170,2645 3195,2620 3525,2620 3535,2610 3535,2265 3545,2255
NetC11_1 on Top Layer "NETC11_1_L01_P031" (solid, pour order 31): 3330,1685 3325,1680 3195,1680 3190,1685 3190,1727.44 3192.56,1730 3285,1730 3305,1750 3325,1750 3330,1745
NetC11_2 on Top Layer "NETC11_2_L01_P030" (solid, pour order 30): 3345,1955 3345,1885 3250,1790 3250,1755 3245.19,1750.19 3134.81,1750.19 3125,1760 3125,2485 3150,2510 3280,2510 3295,2495 3295,2030
NetD1_1 on Top Layer "NETD1_1_L01_P029" (solid, pour order 29): 3130,1180 3145,1195 3440,1195 3455,1180 3505,1180 3515,1170 3515,1115 3500,1100 3500,915 3480,895 3250,895 3130,1015
BATTERY+ on Top Layer "BATTERY+_L01_P027" (solid, pour order 27): 3435,1215 3450,1200 3580,1200 3595,1215 3595,1225 3440,1225
BATTERY+ on Top Layer "BATTERY+_L01_P026" (solid, pour order 26): 2605,1010 2700,1105 2840,1105 3060,1325 3060,1390 3080,1410 3510,1410 3550,1370 3550,1280 3555,1275 3590,1275 3595,1270 3595,1225 3590,1220 3515,1220 3515,1270 3509.19,1275.81 3475.81,1275.81 3470,1270 3470,1225 3460,1215 3115,1215 3100,1200 3100,1010
BATTERY+ on Top Layer "BATTERY+_L01_P024" (solid, pour order 24): 3245,605 3240,610 3240,710 3080,870 2625,870 2605,890 2605,1010 2615,1020 3100,1020 3290,830 3290,605
0V on Top Layer "0V_L01_P023" (solid, pour order 23): 1395,330 1430,365 1920,365 1985,300 1985,240 2005,220 2165,220 2178.04,233.04 2178.04,488.04 2185,495 2185.01,494.99 2289.99,494.99 2290,495 2305,480 2305,475 2300,470 2300,125 2255,80 1425,80 1395,110
+12V on Top Layer "+12V_L01_P021" (solid, pour order 21): 1395,570 1425,600 1905,600 1905,570 2070,405 2070,370 2160,370 2170,360 2170,325 2165,320 1985,320 1925,380 1425,380 1395,410
0V on Top Layer "0V_L01_P019" (solid, pour order 19): 2185,480 2185,485 2195,495 2205,495 2280,570 2320,570 2325,565 2325,525 2330,520 2380,520 2385,515 2385,480 2380,475 2285,475 2280,470 2190,470
NetD2_1 on Top Layer "NETD2_1_L01_P015" (solid, pour order 15): 2590,385 2605,400 2700,400 2790,310 2790,210 2775,195 2660,195 2590,265
NetC1_2 on Top Layer "NETC1_2_L01_P014" (solid, pour order 14): 2305,355 2315,365 2400,365 2430,395 2480,395 2565,480 2565,595 2605,635 2605,725 2620,740 2695,740 2705,730 2705,620 2660,575 2660,475 2545,360 2545,310 2520,285 2395,285 2380,300 2315,300 2305,310
+5V on Top Layer "+5V_L01_P009" (solid, pour order 9): 3010,25 3525,25 3545,45 3545,360 3585,400 3875,400 3895,420 3895,3368.44 3735,3418.44 3735,3210 3735,3172 3735,650 3725,640 3435,640 3253,496.32 3253,228 3230,205 3010,205
+5V on Top Layer "+5V_L01_P012" (solid, pour order 12): 3749.94,3071.88 3700,3130 3660,3170 3605,3230 3430,3230 3425,3235 3425,3335 3430,3340 3510,3340 3515,3345 3515,3380 3510,3385 3445,3385 3440,3390 3440,3415 3445,3420 3735,3420 3749.94,3408.79
+5V on Top Layer "+5V_L01_P011" (solid, pour order 11): 3755,1375 3695,1435 3365,1435 3335,1465 3340,1470 3340,1745 3350,1755 3380,1755 3400,1735 3400,1660 3410,1650 3440,1650 3450,1640 3450,1590 3455,1585 3700,1585 3755,1640
+5V on Top Layer "+5V_L01_P010" (solid, pour order 10): 3750,835 3710,875 3605,875 3575,905 3572.71,1103.38 3605,1115 3605,1144.44 3610.56,1150 3715,1150 3750,1185
BATTERY- on Bottom Layer "BATTERY-_L02_P039" (solid, remove dead copper, pour order 39): 0,0 3937.01,0 3937.01,3937.01 0,3937.01

## Keep-outs
Keep-Out Layer:
  lines w10: -7945.25,3802.19 -7940.25,3807.19 ; -4010.25,-187.81 -4005.25,-182.81

## Silkscreen, mask and mechanical layers (free items; w line width, h text height)
Top Overlay:
  text "B-" at 3157.48,3708.66 h98.43
  text "SD CARD" at 311.02,3035.43 h39.37 r90
  text "GNSS" at 645.67,2811.02 h39.37
  text "RESET" at 133.86,2437.01 h39.37 r90
  text "AUX" at 2059.06,2000 h39.37
  text "BUTTON 0" at 129.92,1874.02 h39.37 r90
  text "BUTTON 1" at 129.92,1346.46 h39.37 r90
  text "MAIN" at 2066.93,1240.16 h39.37
  text "B+" at 3153.54,877.95 h98.82
  text "12-24V" at 1141.73,468.5 h39.37
  text "INPUT" at 1413.39,374.02 h39.37
  text "SIM CARD" at 472.44,318.9 h39.37 r90
  text "0V" at 1279.53,287.4 h39.37
Mechanical 13:
  circle w0.5: c3740.16,196.85 r125.98
  circle w0.5: c196.85,196.85 r125.98
  circle w0.5: c3740.16,3740.16 r125.98
  circle w0.5: c196.85,3740.16 r125.98
  lines w0.5: 0,0 0,3937.01 3937.01,3937.01 3937.01,0 0,0

## Text inside footprints (layer, text, board x,y; h text height)
L3: Top Overlay "RefDes" at 3330,2265 h35.43; Top Overlay "REFDES" at 3332.5,2345 h35.43